# Altium PCB MotorBoard.PcbDoc (part 1 of 2)
Units mm, origin at the board's own origin, x right, y up, seen from the top; angles counter-clockwise.
Board outline 65.2 x 61.84 mm, 2 copper layers (Top Layer, Bottom Layer), stack 1.6 mm thick; 92 components, 59 nets, 370 pads, 87 vias.
Unrouted connection lines stored in the file: 3.
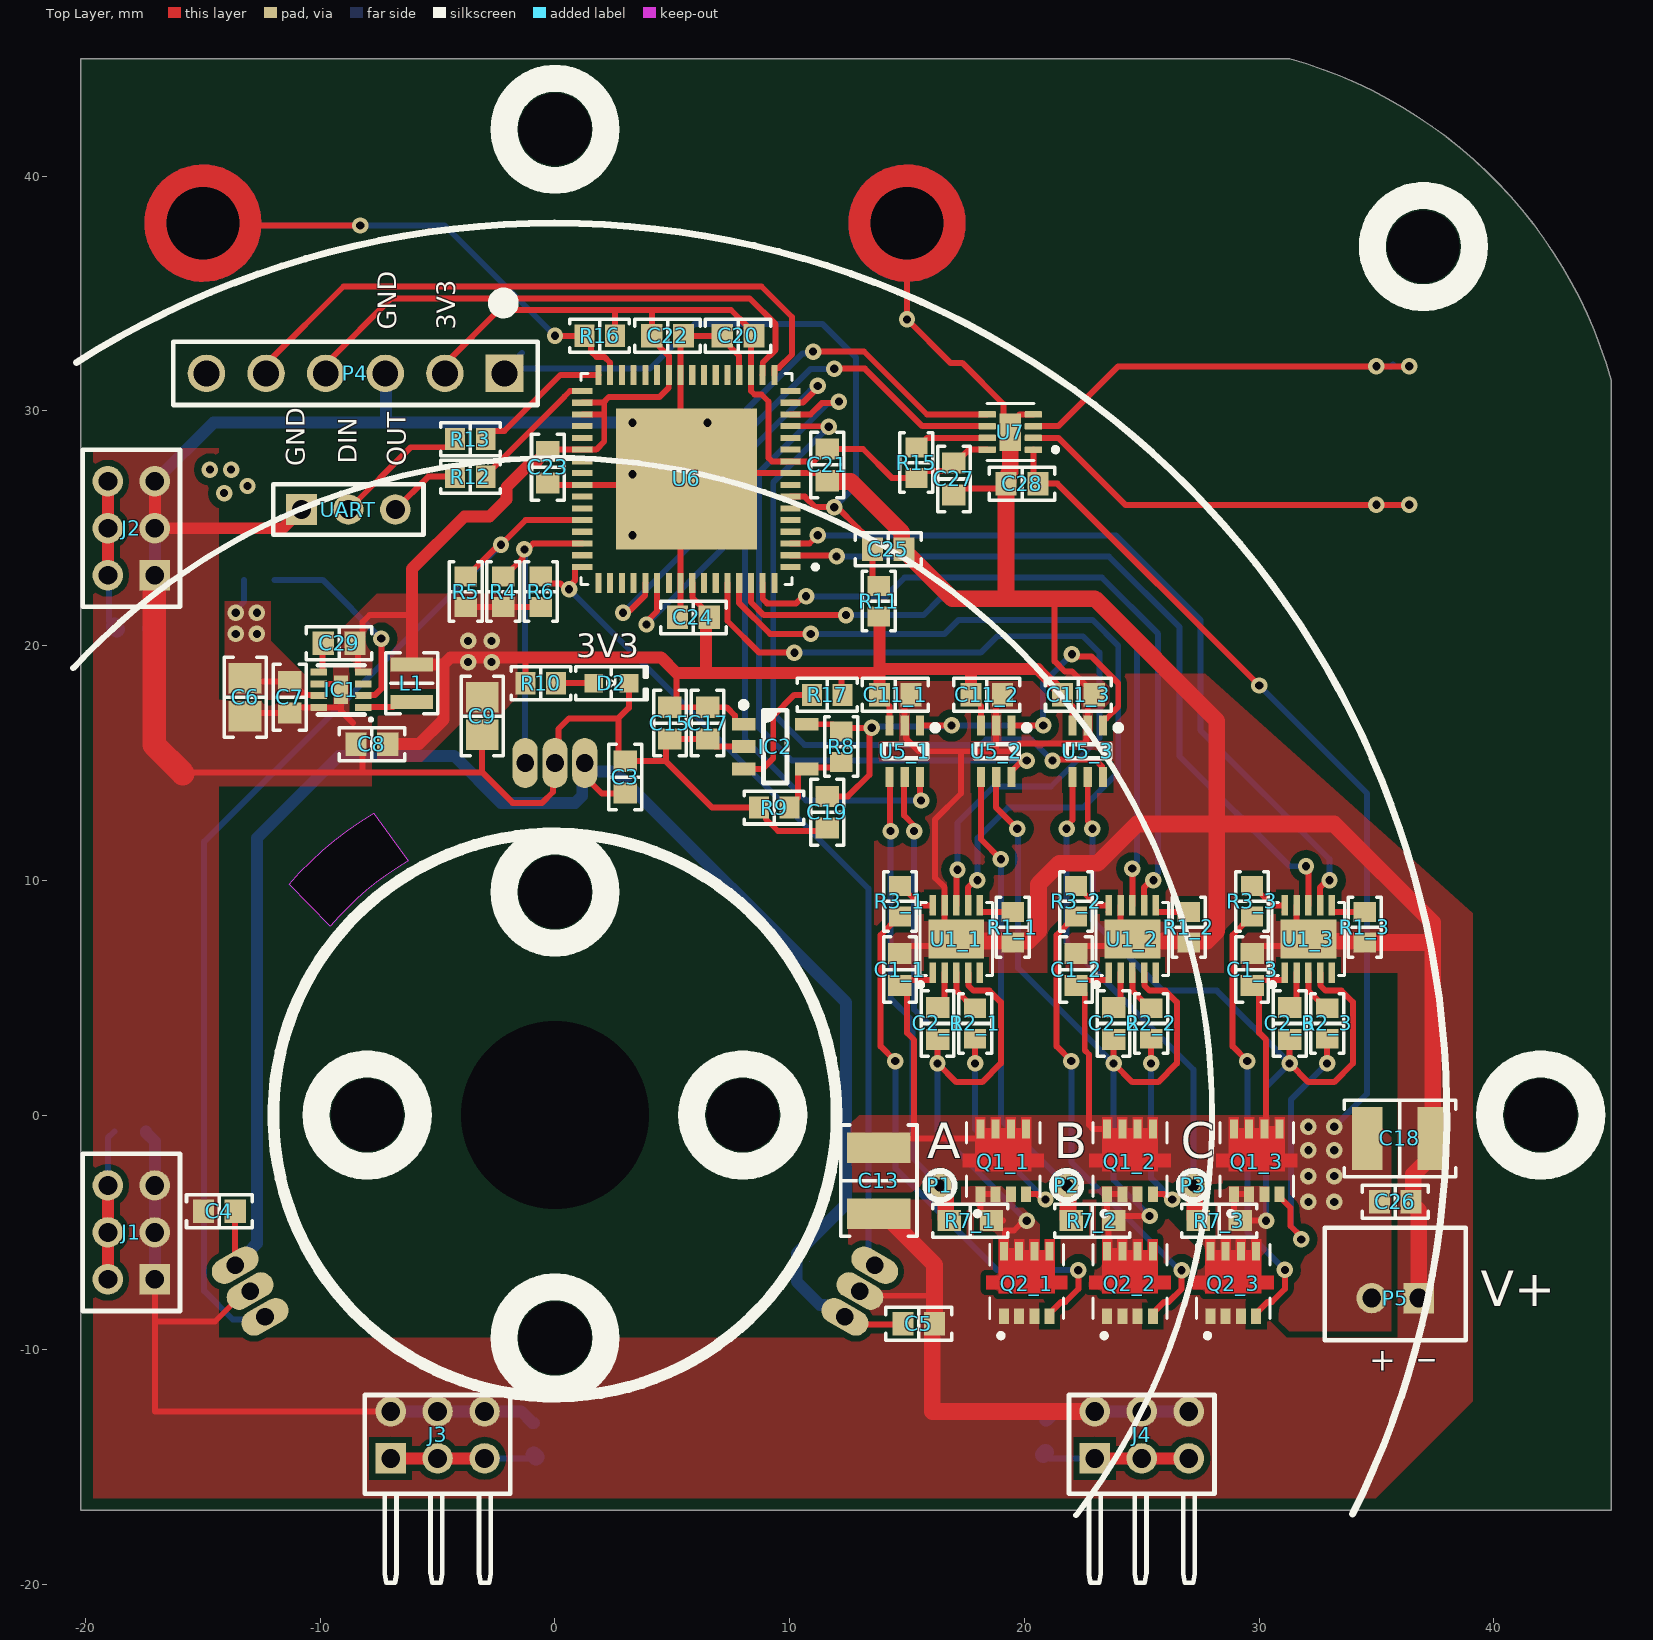
[diagram p0: Top Layer view]
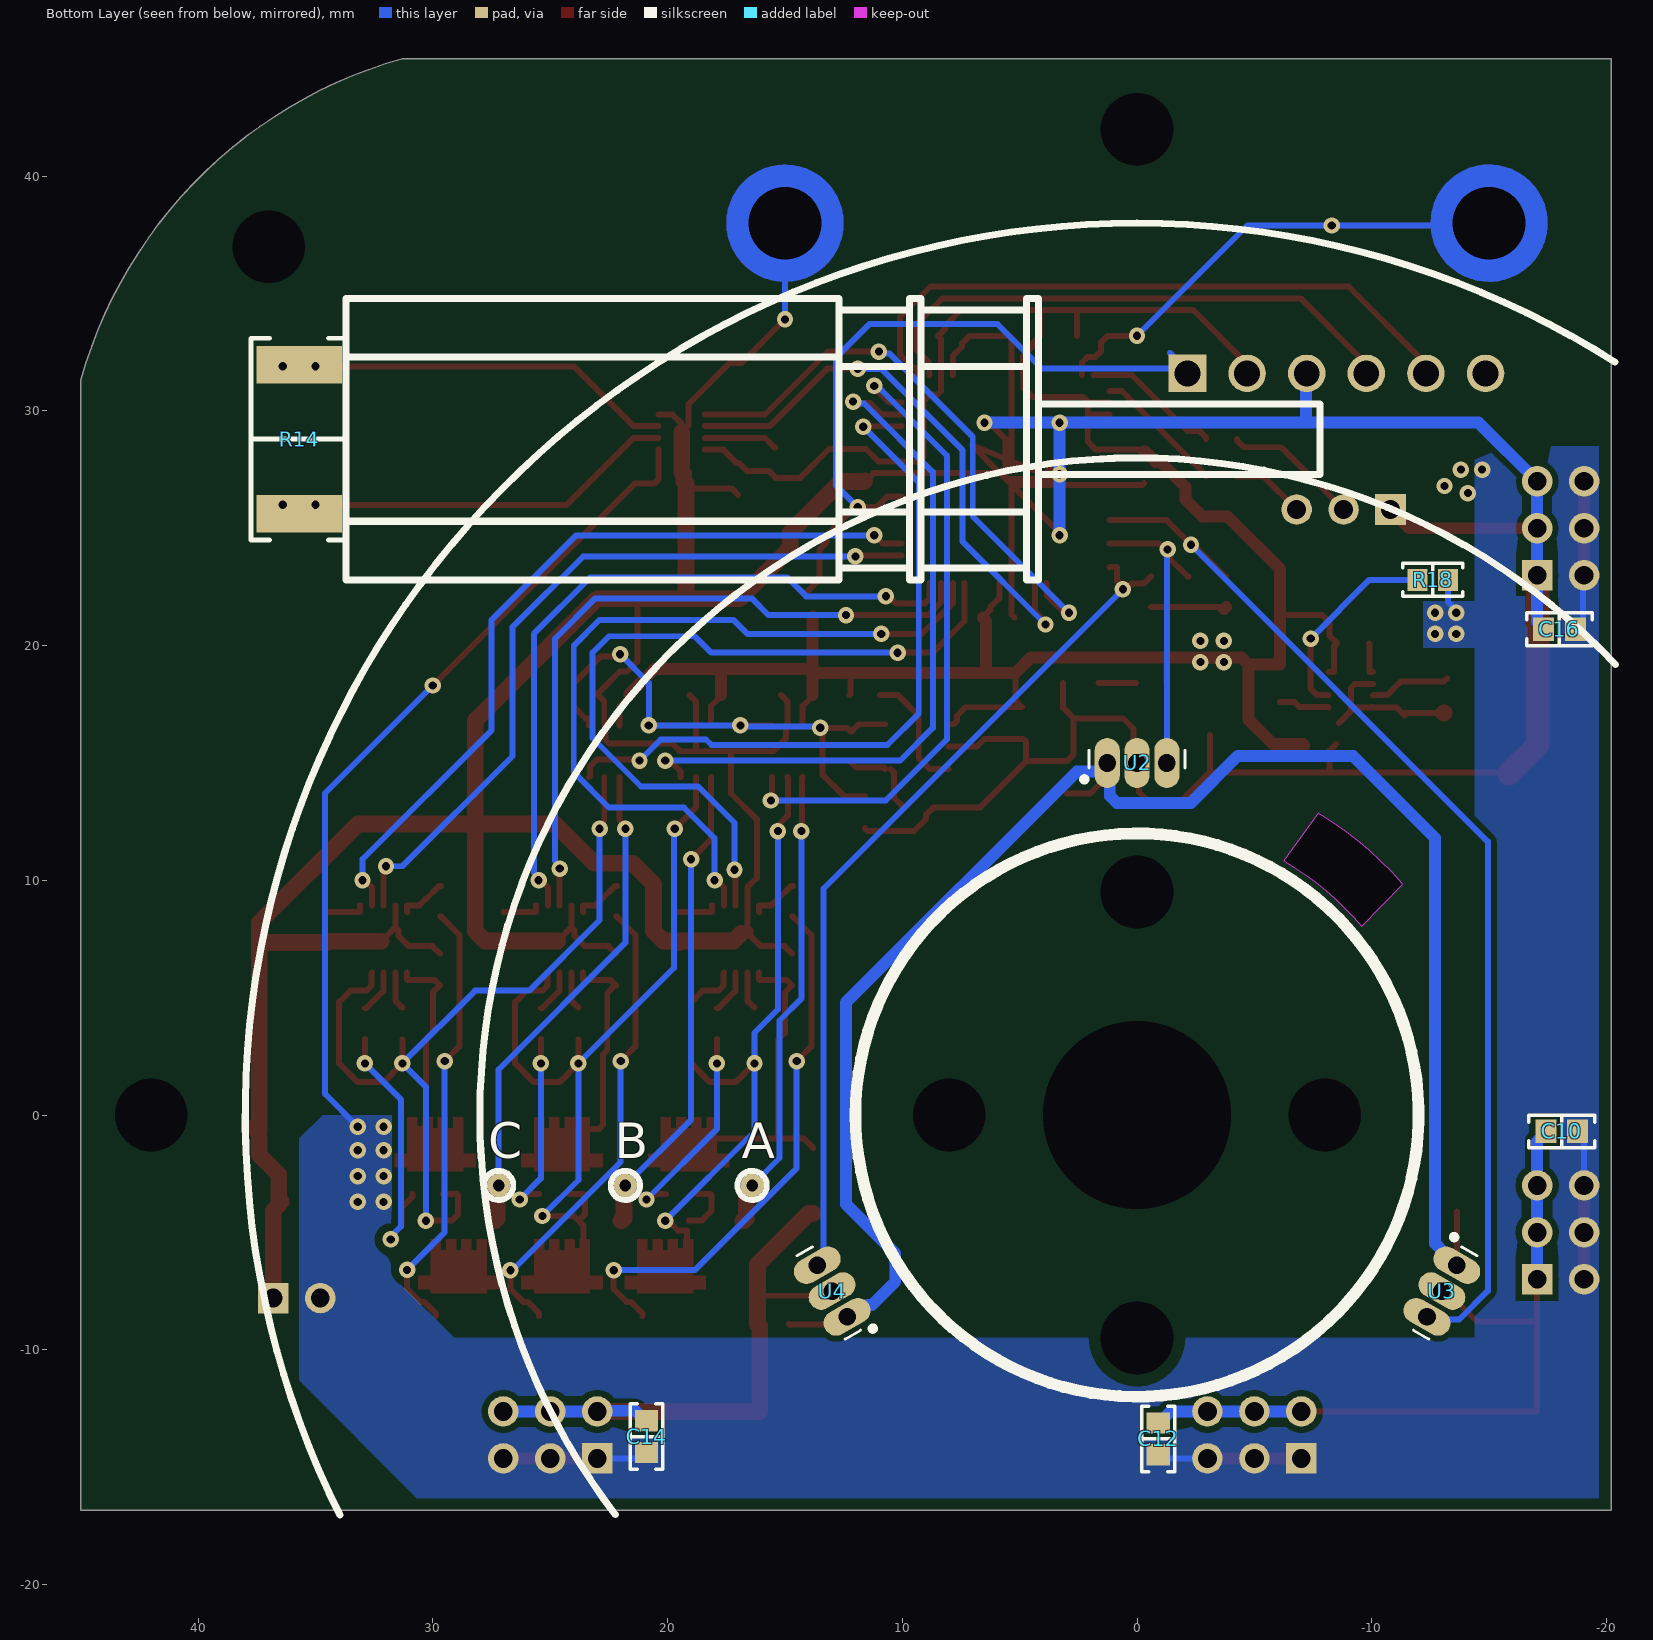
[diagram p1: Bottom Layer view, seen from below]
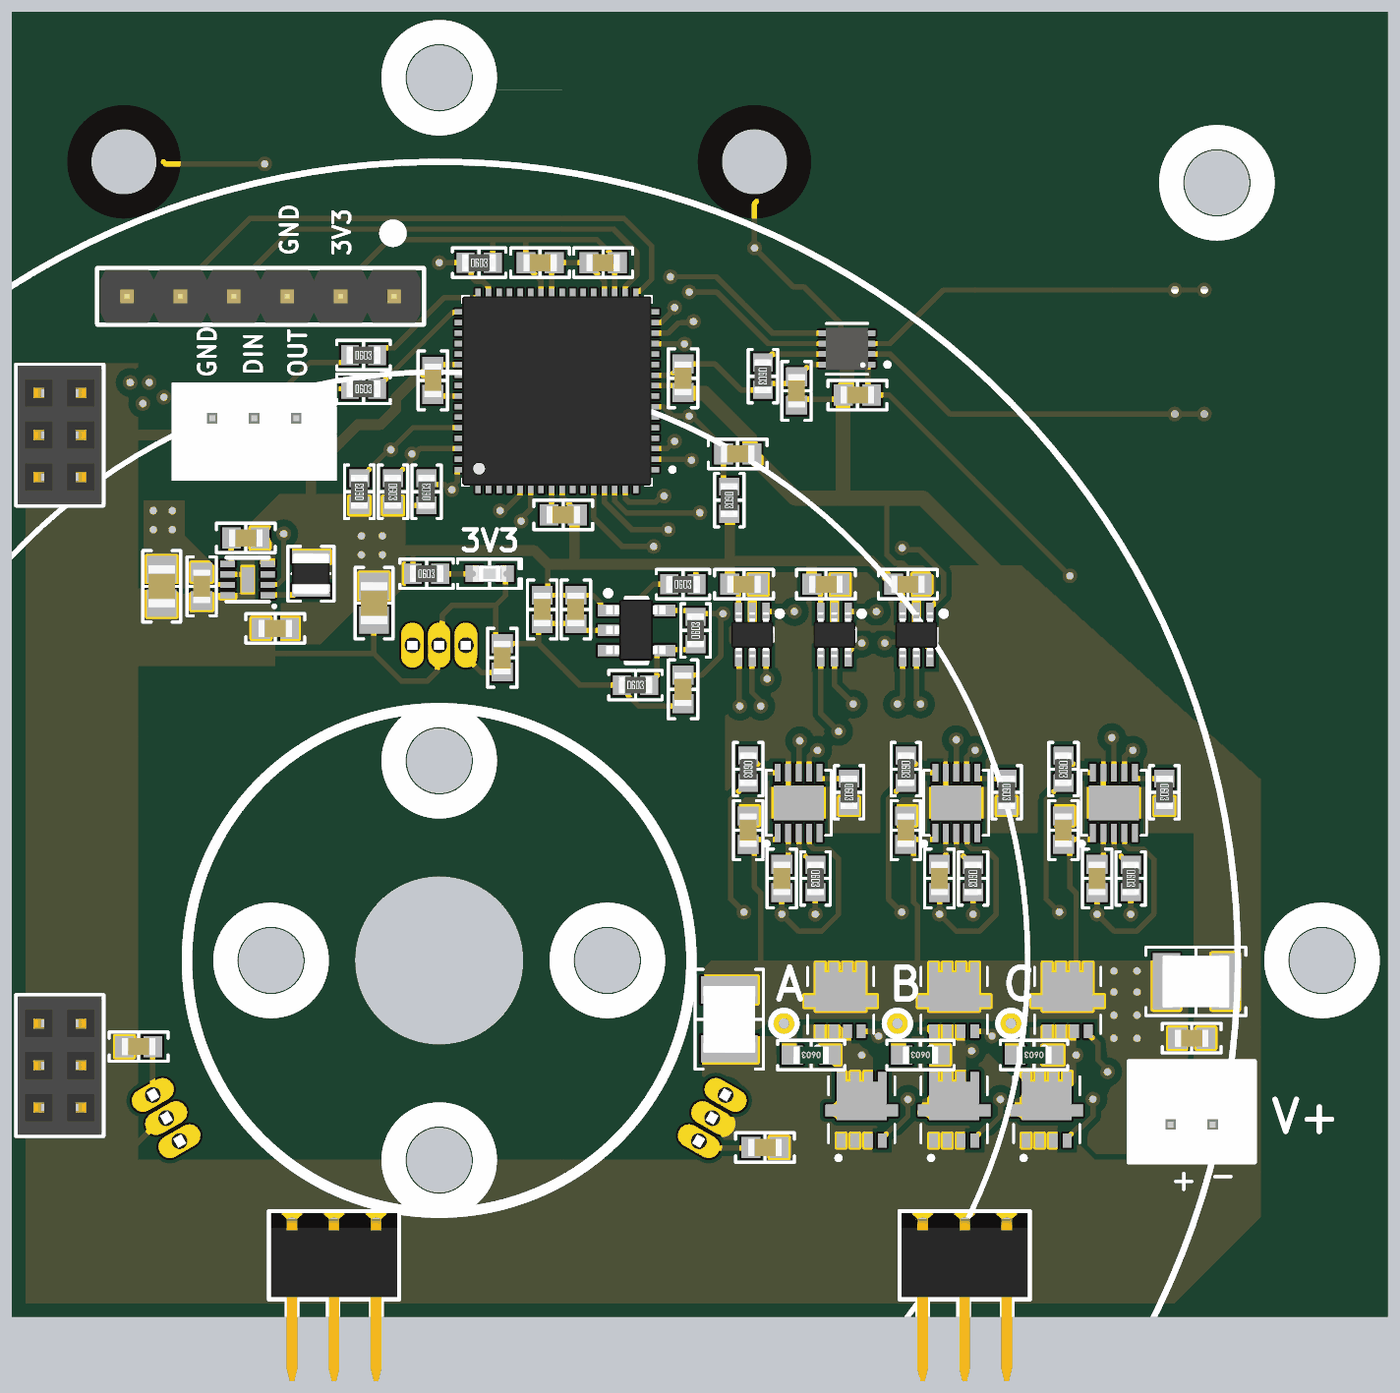
[diagram p2: 3D render of the assembled board from above, using the file's embedded part models]
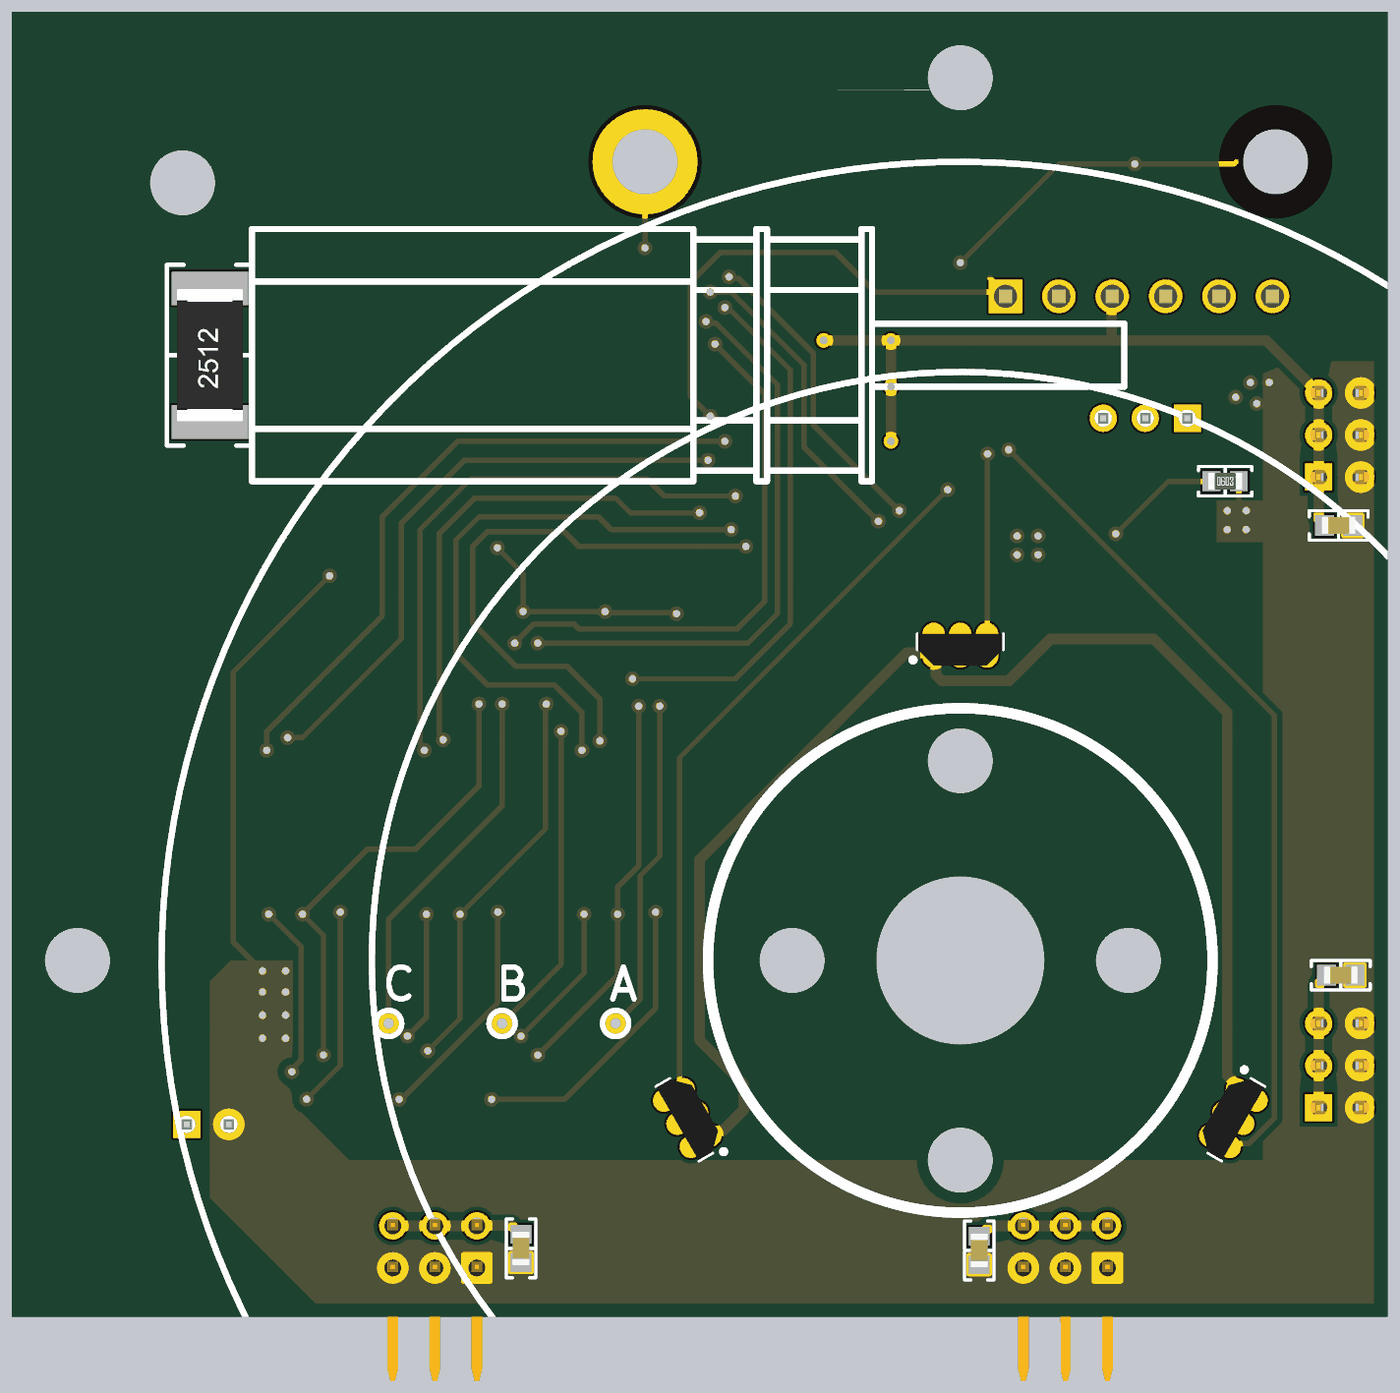
[diagram p3: 3D render of the assembled board from below, using the file's embedded part models]

## Layer stack, top to bottom
Top Solder: solder mask 0.0102, Solder Resist, Dk 3.5
Top Layer: signal copper 0.035
Dielectric 1: dielectric 1.53, FR-4, Dk 4.8
Bottom Layer: signal copper 0.035
Bottom Solder: solder mask 0.0102, Solder Resist, Dk 3.5

## Board outline
-20.2,-16.84 -20.2,45 31.311,45 cw(c26,26) 45,31.311 45,-16.84
cut-out: -9.576,8.035 -11.321,9.841 cw(c0,0) -7.726,12.858 -6.25,10.825 ccw(c0,0)
cut-out: 10.825,-6.25

## Design rules (kind name [scope] priority, off if disabled: settings)
BoardOutlineClearance [All] p1: gap=0.254 ignorepadtopadclearanceinfootprint=FALSE except(0: Arc-SplitContinuation Track-SplitContinuation SMDPad-SplitContinuation THPad-SplitContinuation Via-SplitContinuation Fill-SplitContinuation Poly-SplitContinuation Region-SplitContinuation Text-SplitContinuation; 0.512: Poly-OutlineEdge Poly-CavityEdge Poly-CutoutEdge Poly-SplitBarrior)
Clearance "PolyGon Pour Clearance" [InPolygon] p1: gap=0.254 ignorepadtopadclearanceinfootprint=FALSE except(0.512: Arc-Hole Track-Hole SMDPad-Hole THPad-Hole Via-Hole Fill-Hole Poly-Hole Region-Hole Text-Hole)
Clearance [All] p2: gap=0.152 ignorepadtopadclearanceinfootprint=FALSE except(0.01: Text-Text; 0.127: Arc-Arc Arc-Track Track-Track SMDPad-SMDPad; 0.2: Arc-SMDPad Arc-THPad Arc-Fill Arc-Poly Arc-Region Arc-Hole Track-SMDPad Track-THPad Track-Fill Track-Poly Track-Region Track-Hole; 0.254: Arc-Via Track-Via Via-Via; 0.54: THPad-THPad)
HoleSize [All] p1: absolutevalues=TRUE maxlimit=6.3 minlimit=0.2 maxpercent=80.000 minpercent=20.000
HoleToHoleClearance [All] p1: gap=0.54 allowstackedmicrovias=TRUE
PlaneClearance [All] p1: clearance=0.127
PlaneConnect [All] p1: planeconnectstyle=Direct reliefexpansion=0.508 reliefentries=4 reliefconductorwidth=0.254 reliefairgap=0.254
PolygonConnect [All] p1: connectstyle=Direct reliefconductorwidth=0.254 reliefentries=4 polygonreliefangle="90 Angle" airgapwidth=0.254
RoutingVias [All] p1: holewidth=0.35 width=0.7 viastyle="Through Hole" minholewidth=0.3 minwidth=0.6 maxholewidth=0.5 maxwidth=10
SolderMaskExpansion [All] p1: expansion=0.102 istentingtop=FALSE
Width [All] p1: maxlimit=2 minlimit=0.127 preferedwidth=0.254
26 further rules are at their usual default settings.

## Classes and differential pairs
net class PWML[1..3]: PWML1 PWML2 PWML3
net class PWMH[1..3]: PWMH1 PWMH2 PWMH3
net class HALL_OUT[1..3]: HALL_OUT1 HALL_OUT2 HALL_OUT3
net class I_SENSE[1..3]: I_SENSE1 I_SENSE2 I_SENSE3
net class Bridge_Out[3..1]: Bridge_Out1 Bridge_Out2 Bridge_Out3
channel class Half_bridge_drivers: U_Half_bridge_drivers1 U_Half_bridge_drivers2 U_Half_bridge_drivers3

## Components (designator, comment, footprint, x,y, rotation, side; value= is the part's Value field where it differs from the comment)
C1_1 "1µF" "CAP 0603_1608" 14.7,6.2 r270 top (schematic designator C1)
C1_2 "1µF" "CAP 0603_1608" 22.2,6.2 r270 top (schematic designator C1)
C1_3 "1µF" "CAP 0603_1608" 29.7,6.2 r270 top (schematic designator C1)
C2_1 "0.1µF" "CAP 0603_1608" 16.3,3.9 r90 top (schematic designator C2)
C2_2 "0.1µF" "CAP 0603_1608" 23.8,3.9 r90 top (schematic designator C2)
C2_3 "0.1µF" "CAP 0603_1608" 31.3,3.9 r90 top (schematic designator C2)
C3 "0.1µF" "CAP 0603_1608" 3,14.4 r90 top
C4 "0.1µF" "CAP 0603_1608" -14.3,-4.1 r180 top
C5 "0.1µF" "CAP 0603_1608" 15.5,-8.9 r0 top
C6 "10µF" "CAP 0805_2012" -13.2,17.8 r90 top
C7 "0.1µF" "CAP 0603_1608" -11.3,17.8 r270 top
C8 "1µF" "CAP 0603_1608" -7.8,15.8 r0 top
C9 "22µF" "CAP 0805_2012" -3.1,17 r90 top
C10 "0.1µF" "CAP 0603_1608" -18.1,-0.7 r180 bottom
C11_1 "0.1µF" "CAP 0603_1608" 14.5,17.9 r180 top (schematic designator C11)
C11_2 "0.1µF" "CAP 0603_1608" 18.4,17.9 r180 top (schematic designator C11)
C11_3 "0.1µF" "CAP 0603_1608" 22.3,17.9 r180 top (schematic designator C11)
C12 "0.1µF" "CAP 0603_1608" -0.9,-13.8 r270 bottom
C13 "100µF" "CAP 1210_3225 - 2.8MM" 13.8,-2.8 r90 top
C14 "0.1µF" "CAP 0603_1608" 20.9,-13.7 r90 bottom
C15 "1µF" "CAP 0603_1608" 4.9,16.7 r90 top
C16 "0.1µF" "CAP 0603_1608" -18,20.7 r0 bottom
C17 "0.1µF" "CAP 0603_1608" 6.5,16.7 r270 top
C18 "100µF" "CAP 1210_3225 - 2.8MM" 36,-1 r180 top
C19 "2.2µF" "CAP 0603_1608" 11.6,12.9 r90 top
C20 "0.1µF" "CAP 0603_1608" 7.8,33.2 r180 top
C21 "0.1µF" "CAP 0603_1608" 11.6,27.7 r270 top
C22 "0.1µF" "CAP 0603_1608" 4.8,33.2 r0 top
C23 "0.1µF" "CAP 0603_1608" -0.3,27.6 r270 top
C24 "0.1µF" "CAP 0603_1608" 5.9,21.2 r180 top
C25 "0.1µF" "CAP 0603_1608" 14.2,24.1 r0 top
C26 "0.1µF" "CAP 0603_1608" 35.8,-3.7 r0 top
C27 "0.1µF" "CAP 0603_1608" 17,27.1 r90 top
C28 "0.1µF" "CAP 0603_1608" 19.9,26.9 r180 top
C29 "560pF" "CAP 0603_1608" -9.2,20.1 r0 top
D2 "Green" "LED 0603_1608 GREEN" 2.4,18.4 r0 top
IC1 "MIC23050" "MLF-8 2x2mm" -9.111,18.12 r180 top
IC2 "MIC5377YC5" "TI SOT-23-5 DBV" 9.387,15.7 r0 top
J1 "3x2 Female" 62000621821 -18.05,-5 r90 top
J2 "3x2 Female" 62000621821 -18.05,25 r90 top
J3 "3x2 Male" "2mm 3x2 Male Right - duplicate" -5,-13.63 r0 top
J4 "3x2 Male" "2mm 3x2 Male Right - duplicate" 25,-13.63 r0 top
L1 "2.2uH" "IND 0806_2016" -6.1,18.4 r90 top value=6.8µH
P1 "TP" 2mmHole 16.4,-3 r0 top
P2 "TP" 2mmHole 21.8,-3 r0 top
P3 "TP" 2mmHole 27.2,-3 r0 top
P4 "61300611121" 61300611121 -8.5,31.6 r180 top
P5 "2 pin 2mm JST Male" "2pin - 2mm JST male" 35.8,-7.8 r180 top
Q1_1 "NVTFS5C680NL" NVTFS015N04CTAG 19.1,-1.9 r90 top (schematic designator Q1)
Q1_2 "NVTFS5C680NL" NVTFS015N04CTAG 24.5,-1.9 r90 top (schematic designator Q1)
Q1_3 "NVTFS5C680NL" NVTFS015N04CTAG 29.9,-1.9 r90 top (schematic designator Q1)
Q2_1 "NVTFS5C680NL" NVTFS015N04CTAG 20.1,-7.1 r90 top (schematic designator Q2)
Q2_2 "NVTFS5C680NL" NVTFS015N04CTAG 24.5,-7.1 r90 top (schematic designator Q2)
Q2_3 "NVTFS5C680NL" NVTFS015N04CTAG 28.9,-7.1 r90 top (schematic designator Q2)
R1_1 "10 kOhms" "RES 0603_1608" 19.5,8 r270 top (schematic designator R1)
R1_2 "10 kOhms" "RES 0603_1608" 27,8 r270 top (schematic designator R1)
R1_3 "10 kOhms" "RES 0603_1608" 34.5,8 r270 top (schematic designator R1)
R2_1 "2.55 Ohms" "RES 0603_1608" 17.9,3.9 r270 top (schematic designator R2)
R2_2 "2.55 Ohms" "RES 0603_1608" 25.4,3.9 r270 top (schematic designator R2)
R2_3 "2.55 Ohms" "RES 0603_1608" 32.9,3.9 r270 top (schematic designator R2)
R3_1 "2.55 Ohms" "RES 0603_1608" 14.7,9.1 r270 top (schematic designator R3)
R3_2 "2.55 Ohms" "RES 0603_1608" 22.2,9.1 r270 top (schematic designator R3)
R3_3 "2.55 Ohms" "RES 0603_1608" 29.7,9.1 r270 top (schematic designator R3)
R4 "4.7 kOhms" "RES 0603_1608" -2.2,22.3 r270 top
R5 "4.7 kOhms" "RES 0603_1608" -3.8,22.3 r90 top
R6 "4.7 kOhms" "RES 0603_1608" -0.6,22.3 r90 top
R7_1 "3 mOhms" "STACKPOLE CSR0603" 17.7,-4.5 r180 top (schematic designator R7)
R7_2 "3 mOhms" "STACKPOLE CSR0603" 22.9,-4.5 r180 top (schematic designator R7)
R7_3 "3 mOhms" "STACKPOLE CSR0603" 28.3,-4.5 r180 top (schematic designator R7)
R8 "6.49 kOhms" "RES 0603_1608" 12.2,15.7 r90 top
R9 "10 kOhms" "RES 0603_1608" 9.337,13.1 r0 top
R10 "1 kOhms" "RES 0603_1608" -0.6,18.4 r0 top
R11 "10 kOhms" "RES 0603_1608" 13.8,21.9 r270 top
R12 "21.5 Ohms" "RES 0603_1608" -3.6,27.2 r0 top
R13 "21.5 Ohms" "RES 0603_1608" -3.6,28.8 r0 top
R14 "47 kOhms" "RES 2512_6432" 35.7,28.8 r90 bottom
R15 "1 kOhms" "RES 0603_1608" 15.4,27.8 r270 top
R16 "10 kOhms" "RES 0603_1608" 1.9,33.2 r0 top
R17 "10 kOhms" "RES 0603_1608" 11.6,17.9 r0 top
R18 "10 kOhms" "RES 0603_1608" -12.6,22.8 r180 bottom
U1_1 "DGD0506A" 10-WDFN3030 17.1,7.5 r90 top (schematic designator U1)
U1_2 "DGD0506A" 10-WDFN3030 24.6,7.5 r90 top (schematic designator U1)
U1_3 "DGD0506A" 10-WDFN3030 32.1,7.5 r90 top (schematic designator U1)
U2 "Hall Effect" DRV5011ADLPG 0,15 r180 bottom
U3 "Hall Effect" DRV5011ADLPG -12.99,-7.5 r300 bottom
U4 "Hall Effect" DRV5011ADLPG 12.99,-7.5 r60 bottom
U5_1 "INA210" "TI SC70-6 DCK" 14.9,15.5 r270 top (schematic designator U5)
U5_2 "INA210" "TI SC70-6 DCK" 18.8,15.5 r270 top (schematic designator U5)
U5_3 "INA210" "TI SC70-6 DCK" 22.7,15.5 r270 top (schematic designator U5)
U6 "PIC32MK0512MCF064" QFN50P900X900X100-65N 5.6,27.1 r180 top
U7 "DRV8837CDSGR" SON50P200X200X80-9N 19.4,29.1 r180 top
UART "3 pin 2mm JST Male" "3pin - 2mm header" -8.8,25.8 r0 top

## Footprints (in the part's own frame and the unit in brackets; to place one, negate y for a bottom-side part, rotate by r counter-clockwise, add the part's x,y. Pads: shape width x height; smd on the part's side, far side on the other; paste and mask are expansions set on the pad)
"2mm 3x2 Male Right - duplicate" [mm] "Socket Header, Pitch 2.00 mm, THT, Vertical, dual row, 6p"
  rect 1.3x1.3 hole 0.8: 1(-2,-1)
  round 1.3 hole 0.8: 2(-2,1) 3(0,-1) 4(0,1) 5(2,-1) 6(2,1)
  silkscreen extent -3.1,-6.3 3.1,1.7, body extent -3,-6.4 3,1.6, height 4.33
2mmHole [mm]
  round 1 hole 0.5: 1(0,0)
  silkscreen extent -0.62,-0.62 0.62,0.62
"2pin - 2mm JST male" [mm]
  rect 1.3x1.3 hole 0.8: 1(-1,0)
  round 1.3 hole 0.8: 2(1,0)
  silkscreen extent -3,-3 3,1.8, body extent -2.93,-2.97 2.93,1.7, height 5.89
"3pin - 2mm header" [mm]
  rect 1.3x1.3 hole 0.8: 1(-2,0)
  round 1.3 hole 0.8: 2(0,0) 3(2,0)
  silkscreen extent -3.2,-1.07 3.2,1.07, body extent -3.93,-2.97 3.93,1.7, height 5.89
10-WDFN3030 [mm]
  rect 0.86x0.28 smd: 1(-1.435,1) 2(-1.435,0.5) 3(-1.435,0) 4(-1.435,-0.5) 5(-1.435,-1) 6(1.435,-1) 7(1.435,-0.5) 8(1.435,0) 9(1.435,0.5) 10(1.435,1)
  rect 1.65x2.38 smd: 11(0,0)
  silkscreen extent -2.05,-1.55 1.55,1.63, body extent -1.54,-1.55 1.55,1.56, height 0.8
61300611121 [mm] "Pin Header, pitch 2.54 mm, THT, Vertical, single row, 6p"
  rect 1.6x1.6 hole 1.1: 1(-6.35,0)
  round 1.6 hole 1.1: 2(-3.81,0) 3(-1.27,0) 4(1.27,0) 5(3.81,0) 6(6.35,0)
  silkscreen extent -7.77,-1.35 7.77,1.35, body extent -7.62,-1.27 7.62,1.27, height 8.57
62000621821 [mm] "Socket Header, Pitch 2.00 mm, THT, Vertical, dual row, 6p"
  rect 1.3x1.3 hole 0.8: 1(-2,-1)
  round 1.3 hole 0.8: 2(-2,1) 3(0,-1) 4(0,1) 5(2,-1) 6(2,1)
  silkscreen extent -3.35,-2.07 3.35,2.07, body extent -3.3,-2 3.3,2, height 4.35
"CAP 0603_1608" [mm] "Chip Capacitor, 2-Leads, Body 1.60x0.80mm, IPC Medium Density"
  rect 0.9x1 smd: 1(-0.675,0) 2(0.675,0)
  silkscreen extent -1.4,-0.7 1.4,0.7, body extent -0.8,-0.41 0.8,0.41, height 0.82
"CAP 0805_2012" [mm] "Chip Capacitor, 2-Leads, Body 2.00x1.20mm, IPC Medium Density"
  rect 1.3x1.4 smd: 1(-0.8,0) 2(0.8,0)
  silkscreen extent -1.7,-0.9 1.7,0.9, body extent -1,-0.64 1,0.64, height 1.26
"CAP 1210_3225 - 2.8MM" [mm] "Chip Capacitor, 2-Leads, Body 3.20x2.50mm, IPC Medium Density"
  rect 1.3x2.7 smd: 1(-1.4,0) 2(1.4,0)
  silkscreen extent -2.37,-1.63 2.37,1.63, body extent -1.6,-1.25 1.6,1.25, height 2.8
DRV5011ADLPG [mm]
  oval 1.07x2.14 hole 0.75: 1(-1.27,0) 2(0,0) 3(1.27,0)
  silkscreen extent -2.32,-0.77 2.05,0.54, body extent -2,-0.98 2,0.54, height 11
"IND 0806_2016" [mm] "Chip Capacitor, 2-Leads, Body 2.00x1.20mm, IPC Medium Density"
  rect 0.6x1.8 smd: 1(-0.8,0) 2(0.8,0)
  silkscreen extent -1.3,-1.1 1.3,1.1, body extent -1.01,-0.91 1.01,0.91, height 1.81
"LED 0603_1608 GREEN" [mm] "Chip Diode, 2-Leads, Body 1.60x0.80mm, IPC Medium Density"
  rect 0.8x0.8 smd: 1(-0.75,0) 2(0.75,0)
  silkscreen extent -1.52,-0.7 1.52,0.7, body extent -0.8,-0.4 0.8,0.4, height 0.53
"MLF-8 2x2mm" [mm]
  rect 0.7x0.3 smd: 1(-0.95,0.75) 2(-0.95,0.25) 3(-0.95,-0.25) 4(-0.95,-0.75) 5(0.95,-0.75) 6(0.95,-0.25) 7(0.95,0.25) 8(0.95,0.75)
  rect 0.6x1.2 smd: 9(0,0)
  silkscreen extent -1.28,-1.05 1,1.28, body extent -1,-1 1,1, height 0.85
NVTFS015N04CTAG [mm]
  rect 0.66x0.42 smd: 1(-1.47,0.975) 2(-1.47,0.325) 3(-1.47,-0.325) 4(-1.47,-0.975)
  rect 0.8x0.34 smd: 5(1.3,-0.975) 6(1.3,-0.325) 7(1.3,0.325) 8(1.3,0.975)
  Top Layer region: -0.5,-1.185 -0.5,1.185 -0.32,1.185 -0.32,1.73 0.25,1.73 0.25,1.185 1.8,1.185 1.8,0.765 1.33,0.765 1.33,0.535 1.8,0.535 1.8,0.115 1.33,0.115 1.33,-0.115 1.8,-0.115 1.8,-0.535 1.33,-0.535 1.33,-0.765 1.8,-0.765 1.8,-1.185 0.25,-1.185 0.25,-1.73 -0.32,-1.73 -0.32,-1.185
  silkscreen extent -2.4,-1.58 1.58,1.58, body extent -1.7,-1.7 1.7,1.7, height 1.1
QFN50P900X900X100-65N [mm]
  rect 0.86x0.26 smd: 1(-4.435,3.75) 2(-4.435,3.25) 3(-4.435,2.75) 4(-4.435,2.25) 5(-4.435,1.75) 6(-4.435,1.25) 7(-4.435,0.75) 8(-4.435,0.25) 9(-4.435,-0.25) 10(-4.435,-0.75) 11(-4.435,-1.25) 12(-4.435,-1.75) 13(-4.435,-2.25) 14(-4.435,-2.75) 15(-4.435,-3.25) 16(-4.435,-3.75) 33(4.435,-3.75) 34(4.435,-3.25) 35(4.435,-2.75) 36(4.435,-2.25) 37(4.435,-1.75) 38(4.435,-1.25) 39(4.435,-0.75) 40(4.435,-0.25) 41(4.435,0.25) 42(4.435,0.75) 43(4.435,1.25) 44(4.435,1.75) 45(4.435,2.25) 46(4.435,2.75) 47(4.435,3.25) 48(4.435,3.75)
  rect 0.26x0.86 smd: 17(-3.75,-4.435) 18(-3.25,-4.435) 19(-2.75,-4.435) 20(-2.25,-4.435) 21(-1.75,-4.435) 22(-1.25,-4.435) 23(-0.75,-4.435) 24(-0.25,-4.435) 25(0.25,-4.435) 26(0.75,-4.435) 27(1.25,-4.435) 28(1.75,-4.435) 29(2.25,-4.435) 30(2.75,-4.435) 31(3.25,-4.435) 32(3.75,-4.435) 49(3.75,4.435) 50(3.25,4.435) 51(2.75,4.435) 52(2.25,4.435) 53(1.75,4.435) 54(1.25,4.435) 55(0.75,4.435) 56(0.25,4.435) 57(-0.25,4.435) 58(-0.75,4.435) 59(-1.25,4.435) 60(-1.75,4.435) 61(-2.25,4.435) 62(-2.75,4.435) 63(-3.25,4.435) 64(-3.75,4.435)
  rect 6x6 smd: 65(0,0)
  silkscreen extent -5.6,-4.5 4.5,4.5, body extent -4.52,-4.52 4.52,4.52, height 0.9
"RES 0603_1608" [mm] "Chip Resistor, 2-Leads, Body 1.60x0.80mm, IPC Medium Density"
  rect 0.85x0.95 smd: 1(-0.65,0) 2(0.65,0)
  silkscreen extent -1.27,-0.7 1.27,0.7, body extent -0.8,-0.4 0.8,0.4, height 0.45
"RES 2512_6432" [mm] "Chip Resistor, 2-Leads, Body 6.30x3.15mm, IPC Medium Density"
  rect 1.6x3.65 smd: 1(-3.175,0) 2(3.175,0)
  silkscreen extent -4.3,-2.05 4.3,2.05, body extent -3.15,-1.58 3.15,1.57, height 0.7
SON50P200X200X80-9N [mm]
  rrect25% 0.74x0.28 smd: 1(-0.985,0.75) 2(-0.985,0.25) 3(-0.985,-0.25) 4(-0.985,-0.75) 5(0.985,-0.75) 6(0.985,-0.25) 7(0.985,0.25) 8(0.985,0.75)
  rect 0.9x1.6 smd paste-2: 9(0,0)
  silkscreen extent -2.02,-1.21 1,1.21, body extent -1,-1 1,1, height 0.75
"STACKPOLE CSR0603" [mm] "Chip Resistor, 2-Leads, Body 1.60x0.80mm, IPC Medium Density"
  rect 1x0.9 smd: 1(-0.9,0) 2(0.9,0)
  silkscreen extent -1.6,-0.7 1.6,0.7, body extent -0.85,-0.4 0.85,0.4, height 0.45
"TI SC70-6 DCK" [mm] "SC70, 6-Leads, Body 2.00x2.10mm, Pitch 0.65mm, IPC Medium Density"
  rect 0.85x0.35 smd: 1(-1.1,0.65) 2(-1.1,0) 3(-1.1,-0.65) 4(1.1,-0.65) 5(1.1,0) 6(1.1,0.65)
  silkscreen extent -1.12,-0.9 0.3,1.43, body extent -1.06,-1 1.06,1, height 1.1
"TI SOT-23-5 DBV" [mm] "SOT23, 5-Leads, Body 2.90x2.80mm, Pitch 0.95mm, IPC Medium Density"
  rect 1x0.55 smd: 1(-1.35,0.95) 2(-1.35,0) 3(-1.35,-0.95) 4(1.35,-0.95) 5(1.35,0.95)
  silkscreen extent -1.47,-1.55 0.5,1.9, body extent -1.44,-1.43 1.39,1.48, height 1.5

## Part data
C1_1 C1_2 C1_3 C8 C15: library part GCJ188R71E105KA01D, "CAP CER 1UF 25V X7R 0603", Device Package="0603 (1608 Metric)", Manufacturer="Murata Electronics", Operating Temperature="-55°C ~ 125°C", Ratings=AEC-Q200, Supplier Part Number 1=490-14409-1-ND, Temperature Coefficient=X7R, Tolerance=±10%, Voltage - Rated=25V, Applications="Automotive, Boardflex Sensitive", Capacitance=1µF, ComponentLink1Description=Datasheet, ComponentLink1URL=https://search.murata.co.jp/Ceramy/image/img/A01X/G101/ENG/GCJ188R71E105KA01-01.pdf, ComponentLink2Description="DigiKey Link", ComponentLink2URL=http://digikey.com/product-detail/en/murata-electronics/GCJ188R71E105KA01D/490-14409-1-ND/6606870, Features="Soft Termination", LastUpdated="21-Jan-20 12:01:58 AM", Lifecycle Status=Active, Minimum Order=1, Mounting Type="Surface Mount, MLCC", Package / Case="0603 (1608 Metric)", Packaging=TapeAndReel, Part Number=GCJ188R71E105KA01D, Part Status=Active, PartId=9566, Price=0.05, Series=GCJ, Size / Dimension="0.063\" L x 0.031\" W (1.60mm x 0.80mm)", Supplier 1=DigiKey, Thickness (Max)="0.035\" (0.90mm)"
C2_1 C2_2 C2_3 C3 C4 C5 C7 C10 C11_1 C11_2 C11_3 C12 C14 C16 C17 C20 C21 C22 C23 C24 C25 C26 C27 C28: library part GCG188R92A104KA03D, "CAP CER 0.1UF 100V 0603 EPOXY", Device Package="0603 (1608 Metric)", Manufacturer="Murata Electronics", Operating Temperature="-55°C ~ 150°C", Ratings=AEC-Q200, Supplier Part Number 1=490-18197-1-ND, Temperature Coefficient=X8R, Tolerance=±10%, Voltage - Rated=100V, Applications=Automotive, Capacitance=0.1µF, ComponentLink1Description=Datasheet, ComponentLink1URL=https://search.murata.co.jp/Ceramy/image/img/A01X/G101/ENG/GCG188R92A104KA03-01.pdf, ComponentLink2Description="DigiKey Link", ComponentLink2URL=http://digikey.com/product-detail/en/murata-electronics/GCG188R92A104KA03D/490-18197-1-ND/9867926, Features="Epoxy Mountable", LastUpdated="21-Jan-20 12:01:59 AM", Lifecycle Status=Active, Minimum Order=1, Mounting Type="Surface Mount, MLCC, Epoxy", Package / Case="0603 (1608 Metric)", Packaging=TapeAndReel, Part Number=GCG188R92A104KA03D, Part Status=Active, PartId=9025, Price=0.07, Series=GCG, Size / Dimension="0.063\" L x 0.031\" W (1.60mm x 0.80mm)", Supplier 1=DigiKey, Thickness (Max)="0.035\" (0.90mm)"
C6: library part C2012X7S1E106K125AC, "CAP CER 10UF 25V X7S 0805", Device Package="0805 (2012 Metric)", Manufacturer="TDK Corporation", Operating Temperature="-55°C ~ 125°C", Supplier Part Number 1=445-181600-1-ND, Temperature Coefficient=X7S, Tolerance=±10%, Voltage - Rated=25V, Applications="General Purpose", Capacitance=10µF, ComponentLink1Description=Datasheet, ComponentLink1URL=https://product.tdk.com/en/search/capacitor/ceramic/mlcc/info?part_no=C2012X7S1E106K125AC?ref_disty=digikey, ComponentLink2Description="DigiKey Link", ComponentLink2URL=http://digikey.com/product-detail/en/tdk-corporation/C2012X7S1E106K125AC/445-181600-1-ND/9991478, Features="Low ESL", LastUpdated="21-Jan-20 12:03:04 AM", Lifecycle Status=Active, Minimum Order=1, Mounting Type="Surface Mount, MLCC", Package / Case="0805 (2012 Metric)", Packaging=TapeAndReel, Part Number=C2012X7S1E106K125AC, Part Status=Active, PartId=3339, Price=0.15, Series=C, Size / Dimension="0.079\" L x 0.049\" W (2.00mm x 1.25mm)", Supplier 1=DigiKey, Thickness (Max)="0.057\" (1.45mm)"
C9: library part CL21A226MOQNNNE, "CAP CER 22UF 16V X5R 0805", Device Package="0805 (2012 Metric)", Manufacturer="Samsung Electro-Mechanics", Operating Temperature="-55°C ~ 85°C", Supplier Part Number 1=1276-2909-1-ND, Temperature Coefficient=X5R, Tolerance=±20%, Voltage - Rated=16V, Applications="General Purpose", Capacitance=22µF, ComponentLink1Description=Datasheet, ComponentLink1URL=http://www.samsungsem.com/kr/support/product-search/mlcc/CL21A226MOQNNNE.jsp, ComponentLink2Description="DigiKey Link", ComponentLink2URL=http://digikey.com/product-detail/en/samsung-electro-mechanics/CL21A226MOQNNNE/1276-2909-1-ND/3890995, LastUpdated="21-Jan-20 12:03:05 AM", Lifecycle Status=Active, Minimum Order=1, Mounting Type="Surface Mount, MLCC", Package / Case="0805 (2012 Metric)", Packaging=TapeAndReel, Part Number=CL21A226MOQNNNE, Part Status=Active, PartId=3052, Price=0.11, Series=CL, Size / Dimension="0.079\" L x 0.049\" W (2.00mm x 1.25mm)", Supplier 1=DigiKey, Thickness (Max)="0.055\" (1.40mm)"
C13 C18: library part EMK325ABJ107MM-P, "CAP CER 100UF 16V X5R 1210", Device Package="1210 (3225 Metric)", Manufacturer="Taiyo Yuden", Operating Temperature="-55°C ~ 85°C", Supplier Part Number 1=587-5426-1-ND, Temperature Coefficient=X5R, Tolerance=±20%, Voltage - Rated=16V, Applications="General Purpose", Capacitance=100µF, ComponentLink1Description=Datasheet, ComponentLink1URL="https://ds.yuden.co.jp/TYCOMPAS/ut/detail?pn=EMK325ABJ107MM-P &u=M", ComponentLink2Description="DigiKey Link", ComponentLink2URL=http://digikey.com/product-detail/en/taiyo-yuden/EMK325ABJ107MM-P/587-5426-1-ND/7067102, LastUpdated="21-Jan-20 12:30:21 AM", Lifecycle Status=Active, Minimum Order=1, Mounting Type="Surface Mount, MLCC", Package / Case="1210 (3225 Metric)", Packaging=TapeAndReel, Part Number=EMK325ABJ107MM-P, Part Status=Active, PartId=24141, Price=0.71, Series=M, Size / Dimension="0.126\" L x 0.098\" W (3.20mm x 2.50mm)", Supplier 1=DigiKey, Thickness (Max)="0.110\" (2.80mm)"
C19: library part CC0603ZRY5V5BB225, "CAP CER 2.2UF 6.3V Y5V 0603", Device Package="0603 (1608 Metric)", Manufacturer=Yageo, Operating Temperature="-30°C ~ 85°C", Supplier Part Number 1=311-1452-1-ND, Temperature Coefficient="Y5V (F)", Tolerance="-20%, +80%", Voltage - Rated=6.3V, Applications="General Purpose", Capacitance=2.2µF, ComponentLink1Description=Datasheet, ComponentLink1URL=http://www.yageo.com/documents/recent/UPY-GPHC_Y5V_6.3V-to-50V_8.pdf, ComponentLink2Description="DigiKey Link", ComponentLink2URL=http://digikey.com/product-detail/en/yageo/CC0603ZRY5V5BB225/311-1452-1-ND/2833758, LastUpdated="21-Jan-20 12:02:09 AM", Lifecycle Status=Active, Minimum Order=1, Mounting Type="Surface Mount, MLCC", Package / Case="0603 (1608 Metric)", Packaging=TapeAndReel, Part Number=CC0603ZRY5V5BB225, Part Status=Active, PartId=2250, Price=0.02, Series=CC, Size / Dimension="0.063\" L x 0.031\" W (1.60mm x 0.80mm)", Supplier 1=DigiKey, Thickness (Max)="0.035\" (0.90mm)"
C29: library part GCJ188R71E105KA01D, "CAP CER 1UF 25V X7R 0603", Capacitance=1µF, Device Package="0603 (1608 Metric)", Manufacturer="Murata Electronics", Operating Temperature="-55°C ~ 125°C", Ratings=AEC-Q200, Supplier Part Number 1=490-14409-1-ND, Temperature Coefficient=X7R, Tolerance=±10%, Voltage - Rated=25V, Applications="Automotive, Boardflex Sensitive", ComponentLink1Description=Datasheet, ComponentLink1URL=https://search.murata.co.jp/Ceramy/image/img/A01X/G101/ENG/GCJ188R71E105KA01-01.pdf, ComponentLink2Description="DigiKey Link", ComponentLink2URL=http://digikey.com/product-detail/en/murata-electronics/GCJ188R71E105KA01D/490-14409-1-ND/6606870, Features="Soft Termination", LastUpdated="21-Jan-20 12:01:58 AM", Lifecycle Status=Active, Minimum Order=1, Mounting Type="Surface Mount, MLCC", Package / Case="0603 (1608 Metric)", Packaging=TapeAndReel, Part Number=GCJ188R71E105KA01D, Part Status=Active, PartId=9566, Price=0.05, Series=GCJ, Size / Dimension="0.063\" L x 0.031\" W (1.60mm x 0.80mm)", Supplier 1=DigiKey, Thickness (Max)="0.035\" (0.90mm)"
D2: library part XZCDGK53W-8VF, "1.6X0.8MM LC GREEN PIXSOLED DOME", Current - Test=2mA, Device Package="0603 (1608 Metric)", Lens Color=Colorless, Manufacturer=SunLED, Millicandela Rating=417mcd, Supplier Device Package=2-SMD, Supplier Part Number 1=1497-XZCDGK53W-8VFCT-ND, Voltage - Forward (Vf) (Typ)=2.65V, Color=Green, ComponentLink1Description=Datasheet, ComponentLink1URL=https://www.sunledusa.com/products/spec/XZCDGK53W-8VF.pdf, ComponentLink2Description="DigiKey Link", ComponentLink2URL=http://digikey.com/product-detail/en/sunled/XZCDGK53W-8VF/1497-XZCDGK53W-8VFCT-ND/10449792, Configuration=Independent, Height (Max)=1.10mm, LastUpdated="21-Jan-20 3:12:09 AM", Lens Size="0.35mm Dia", Lens Style="Round with Domed Top", Lens Transparency=Clear, Lifecycle Status=Active, Minimum Order=1, Mounting Type="Surface Mount", Package / Case="0603 (1608 Metric)", Packaging=Unknown, Part Number=XZCDGK53W-8VF, Part Status=Active, PartId=938, Price=0.18, Series="Ultra Low Current", Size / Dimension="1.60mm L x 0.80mm W", Supplier 1=DigiKey, Viewing Angle=60°, Wavelength - Dominant=525nm, Wavelength - Peak=515nm
IC2: "IC REG LIN POS ADJ 150MA SOT23-5", Current - Output=150mA, Current - Quiescent (Iq)=100µA, Current - Supply (Max)=140µA, Device Package="SC-74A, SOT-753", Manufacturer="Texas Instruments", Operating Temperature="-40°C ~ 125°C", Supplier Device Package=SOT-23-5, Supplier Part Number 1=296-11014-1-ND, Voltage - Input (Max)=10V, Voltage - Output (Max)=6.5V, Voltage - Output (Min/Fixed)=1.5V, ComponentLink1Description=Datasheet, ComponentLink1URL=http://www.ti.com/general/docs/suppproductinfo.tsp?distId=10&gotoUrl=http%3A%2F%2Fwww.ti.com%2Flit%2Fgpn%2Ftps763, ComponentLink2Description="DigiKey Link", ComponentLink2URL=http://digikey.com/product-detail/en/texas-instruments/TPS76301DBVR/296-11014-1-ND/477331, Control Features=Enable, LastUpdated="18-Jan-20 8:02:45 PM", Lifecycle Status=Active, Minimum Order=1, Mounting Type="Surface Mount", Number of Regulators=1, Output Configuration=Positive, Output Type=Adjustable, Package / Case="SC-74A, SOT-753", Packaging=TapeAndReel, Part Number=MIC5377YC5, Part Status=Active, Price=0.33, Protection Features="Over Current, Over Temperature, Reverse Polarity", PSRR="60dB (1kHz)", Series=-, Supplier 1=DigiKey
J1 J2: library part 62000621821, "WR-PHD Socket Header, THT, pitch 2mm, Dual Row, Vertical, 6p", Contact Resistance=20mOhm, Manufacturer="Wurth Elektronik", Operating Temperature="-40 to +105degC", Rated Current=2A, Withstanding Voltage=500VAC, Working Voltage=250VAC, ComponentLink1Description=Manufacturer, ComponentLink1URL=http://www.we-online.de, ComponentLink2Description=Datasheet, ComponentLink2URL=https://www.we-online.com/catalog/datasheet/62000621821.pdf, Gender="Socket Header", Manufacturer Part Number=62000621821, Mounting Technology=THT, Orientation=Vertical, Packaging=Tube, Pin Number=6, Pitch=2mm, Published Date="May 2020", Row Number=Dual
J3 J4: library part "2mm Male 3x2 Right", "2mm Male 3x2 Right", Contact Resistance=20mOhm, Manufacturer="Wurth Elektronik", Manufacturer Part Number=62000621821, Operating Temperature="-40 to +105degC", Rated Current=2A, Withstanding Voltage=500VAC, Working Voltage=250VAC, ComponentLink1Description=Manufacturer, ComponentLink1URL=http://www.we-online.de, ComponentLink2Description=Datasheet, ComponentLink2URL=https://www.we-online.com/catalog/datasheet/62000621821.pdf, Gender="Socket Header", Mounting Technology=THT, Orientation=Vertical, Packaging=Tube, Pin Number=6, Pitch=2mm, Published Date="May 2020", Row Number=Dual
L1: library part LQH2MPN6R8MGRL, "FIXED IND 6.8UH 530MA 864 MOHM", Current - Saturation=730mA, Current Rating (Amps)=530mA, DC Resistance (DCR)="864mOhm Max", Device Package="0806 (2016 Metric)", Frequency - Self Resonant=35MHz, Inductance=6.8µH, Inductance Frequency - Test=1MHz, Manufacturer="Murata Electronics", Operating Temperature="-40°C ~ 105°C", Supplier Part Number 1=490-15920-1-ND, Tolerance=±20%, ComponentLink1Description=Datasheet, ComponentLink1URL=https://search.murata.co.jp/Ceramy/image/img/P02/JELF243A-0142.pdf, ComponentLink2Description="DigiKey Link", ComponentLink2URL=http://digikey.com/product-detail/en/murata-electronics/LQH2MPN6R8MGRL/490-15920-1-ND/6800585, Height - Seated (Max)="0.037\" (0.95mm)", LastUpdated="21-Jan-20 3:55:54 AM", Lifecycle Status=Active, Material - Core=Ferrite, Minimum Order=1, Mounting Type="Surface Mount", Package / Case="0806 (2016 Metric)", Packaging=TapeAndReel, Part Number=LQH2MPN6R8MGRL, Part Status=Active, PartId=3181, Price=0.10, Series=LQH2, Shielding=Shielded, Size / Dimension="0.079\" L x 0.063\" W (2.00mm x 1.60mm)", Supplier 1=DigiKey, Supplier Device Package="0806 (2016 Metric)", Type=Wirewound
P4: "WR-PHD Pin Header, THT, pitch 2.54mm, Single Row, Vertical, 6p", Contact Resistance=20mOhm, Manufacturer="Wurth Elektronik", Operating Temperature="-40 to +105degC", Rated Current=3A, Withstanding Voltage=500VAC, Working Voltage=250VAC, ComponentLink1Description=Manufacturer, ComponentLink1URL=http://www.we-online.de, ComponentLink2Description=Datasheet, ComponentLink2URL=https://www.we-online.com/catalog/datasheet/61300611121.pdf, Gender="Pin Header", Manufacturer Part Number=61300611121, Mounting Technology=THT, Orientation=Vertical, Packaging=Bag, Pin Number=6, Pitch=2.54mm, Published Date="May 2020", Row Number=Single
R1_1 R1_2 R1_3 R9 R11 R16 R17 R18: library part RNCS0603BKE10K0, "RES 10K OHM 0.1% 1/16W 0603", Device Package="0603 (1608 Metric)", Manufacturer="Stackpole Electronics Inc", Operating Temperature="-55°C ~ 155°C", Power (Watts)="0.063W, 1/16W", Ratings=AEC-Q200, Supplier Device Package=0603, Supplier Part Number 1=RNCS0603BKE10K0CT-ND, Temperature Coefficient=±25ppm/°C, Tolerance=±0.1%, ComponentLink1Description=Datasheet, ComponentLink1URL=https://www.seielect.com/catalog/sei-rncs_rnch.pdf, ComponentLink2Description="DigiKey Link", ComponentLink2URL=http://digikey.com/product-detail/en/stackpole-electronics-inc/RNCS0603BKE10K0/RNCS0603BKE10K0CT-ND/1800113, Composition="Thin Film", Features="Anti-Corrosive, Automotive AEC-Q200, Moisture Resistant", Height - Seated (Max)="0.022\" (0.55mm)", LastUpdated="21-Jan-20 12:25:01 AM", Lifecycle Status=Active, Minimum Order=1, Number of Terminations=2, Package / Case="0603 (1608 Metric)", Packaging=TapeAndReel, Part Number=RNCS0603BKE10K0, Part Status=Active, PartId=4838, Price=0.08, Resistance="10 kOhms", Series=RNCS, Size / Dimension="0.061\" L x 0.031\" W (1.55mm x 0.80mm)", Supplier 1=DigiKey
R2_1 R2_2 R2_3 R3_1 R3_2 R3_3: library part CRCW06032R55FKEA, "RES SMD 2.55 OHM 1% 1/10W 0603", Device Package="0603 (1608 Metric)", Manufacturer="Vishay Dale", Operating Temperature="-55°C ~ 155°C", Power (Watts)="0.1W, 1/10W", Ratings=AEC-Q200, Supplier Device Package=0603, Supplier Part Number 1=541-2.55HHCT-ND, Temperature Coefficient=±100ppm/°C, Tolerance=±1%, ComponentLink1Description=Datasheet, ComponentLink1URL=http://www.vishay.com/docs/20035/dcrcwe3.pdf, ComponentLink2Description="DigiKey Link", ComponentLink2URL=http://digikey.com/product-detail/en/vishay-dale/CRCW06032R55FKEA/541-2.55HHCT-ND/1962041, Composition="Thick Film", Features="Automotive AEC-Q200", Height - Seated (Max)="0.020\" (0.50mm)", LastUpdated="21-Jan-20 12:16:55 AM", Lifecycle Status=Active, Minimum Order=1, Number of Terminations=2, Package / Case="0603 (1608 Metric)", Packaging=CutTape, Part Number=CRCW06032R55FKEA, Part Status=Active, PartId=23466, Price=0.10, Resistance="2.55 Ohms", Series=CRCW, Size / Dimension="0.061\" L x 0.033\" W (1.55mm x 0.85mm)", Supplier 1=DigiKey
R4 R5 R6: library part CRCW06034K70FKTA, "RES SMD 4.7K OHM 1% 1/10W 0603", Device Package="0603 (1608 Metric)", Manufacturer="Vishay Dale", Operating Temperature="-55°C ~ 155°C", Power (Watts)="0.1W, 1/10W", Ratings=AEC-Q200, Supplier Device Package=0603, Supplier Part Number 1=541-3004-1-ND, Temperature Coefficient=±100ppm/°C, Tolerance=±1%, ComponentLink1Description=Datasheet, ComponentLink1URL=http://www.vishay.com/docs/20008/dcrcw.pdf, ComponentLink2Description="DigiKey Link", ComponentLink2URL=http://digikey.com/product-detail/en/vishay-dale/CRCW06034K70FKTA/541-3004-1-ND/6073647, Composition="Thick Film", Features="Automotive AEC-Q200", Height - Seated (Max)="0.020\" (0.50mm)", LastUpdated="21-Jan-20 12:16:37 AM", Lifecycle Status=Active, Minimum Order=1, Number of Terminations=2, Package / Case="0603 (1608 Metric)", Packaging=TapeAndReel, Part Number=CRCW06034K70FKTA, Part Status=Active, PartId=23863, Price=0.01, Resistance="4.7 kOhms", Series=CRCW, Size / Dimension="0.063\" L x 0.033\" W (1.60mm x 0.85mm)", Supplier 1=DigiKey
R7_1 R7_2 R7_3: library part CSS0603FT3L00, "RES SHUNT, 0603, 0.003 OHM, 1%,", Device Package="0603 (1608 Metric)", Manufacturer="Stackpole Electronics Inc", Operating Temperature="-55°C ~ 155°C", Power (Watts)="0.333W, 1/3W", Ratings=AEC-Q200, Supplier Device Package=0603, Supplier Part Number 1=738-CSS0603FT3L00CT-ND, Temperature Coefficient=±100ppm/°C, Tolerance=±1%, ComponentLink2Description="DigiKey Link", ComponentLink2URL=http://digikey.com/product-detail/en/stackpole-electronics-inc/CSS0603FT3L00/738-CSS0603FT3L00CT-ND/10719388, Composition="Metal Element", Features="Automotive AEC-Q200, Current Sense", Height - Seated (Max)="0.026\" (0.65mm)", LastUpdated="19-Jul-20 11:45:32 PM", Lifecycle Status=Active, Minimum Order=1, Number of Terminations=2, Packaging=TapeAndReel, Part Number=CSS0603FT3L00, Part Status=Active, PartId=1932, Price=0.10, Resistance="3 mOhms", Series=CSS, Size / Dimension="0.063\" L x 0.031\" W (1.60mm x 0.80mm)", Supplier 1=DigiKey
R8: library part RC0603FR-076K49L, "RES SMD 6.49K OHM 1% 1/10W 0603", Device Package="0603 (1608 Metric)", Manufacturer=Yageo, Operating Temperature="-55°C ~ 155°C", Power (Watts)="0.1W, 1/10W", Supplier Device Package=0603, Supplier Part Number 1=311-6.49KHRCT-ND, Temperature Coefficient=±100ppm/°C, Tolerance=±1%, ComponentLink1Description=Datasheet, ComponentLink1URL=https://www.yageo.com/upload/media/product/productsearch/datasheet/rchip/PYu-RC_Group_51_RoHS_L_10.pdf, ComponentLink2Description="DigiKey Link", ComponentLink2URL=http://digikey.com/product-detail/en/yageo/RC0603FR-076K49L/311-6.49KHRCT-ND/730268, Composition="Thick Film", Features="Moisture Resistant", Height - Seated (Max)="0.022\" (0.55mm)", LastUpdated="21-Jan-20 12:22:01 AM", Lifecycle Status=Active, Minimum Order=1, Number of Terminations=2, Package / Case="0603 (1608 Metric)", Packaging=CutTape, Part Number=RC0603FR-076K49L, Part Status=Active, PartId=12285, Price=0.10, Resistance="6.49 kOhms", Series=RC, Size / Dimension="0.063\" L x 0.031\" W (1.60mm x 0.80mm)", Supplier 1=DigiKey
R10: library part RNCF0603DTE1K00, "RES 1K OHM 0.5% 1/10W 0603", Device Package="0603 (1608 Metric)", Manufacturer="Stackpole Electronics Inc", Operating Temperature="-55°C ~ 155°C", Power (Watts)="0.1W, 1/10W", Ratings=AEC-Q200, Supplier Device Package=0603, Supplier Part Number 1=RNCF0603DTE1K00CT-ND, Temperature Coefficient=±25ppm/°C, Tolerance=±0.5%, ComponentLink1Description=Datasheet, ComponentLink1URL=https://www.seielect.com/catalog/sei-rncf.pdf, ComponentLink2Description="DigiKey Link", ComponentLink2URL=http://digikey.com/product-detail/en/stackpole-electronics-inc/RNCF0603DTE1K00/RNCF0603DTE1K00CT-ND/9915086, Composition="Thin Film", Features="Automotive AEC-Q200", Height - Seated (Max)="0.022\" (0.55mm)", LastUpdated="21-Jan-20 12:14:28 AM", Lifecycle Status=Active, Minimum Order=1, Number of Terminations=2, Package / Case="0603 (1608 Metric)", Packaging=TapeAndReel, Part Number=RNCF0603DTE1K00, Part Status=Active, PartId=26300, Price=0.05, Resistance="1 kOhms", Series=RNCF, Size / Dimension="0.061\" L x 0.031\" W (1.55mm x 0.80mm)", Supplier 1=DigiKey
R12 R13: library part ERJ-3EKF21R5V, "RES SMD 21.5 OHM 1% 1/10W 0603", Device Package="0603 (1608 Metric)", Manufacturer="Panasonic Electronic Components", Operating Temperature="-55°C ~ 155°C", Power (Watts)="0.1W, 1/10W", Ratings=AEC-Q200, Supplier Device Package=0603, Supplier Part Number 1=P21.5HCT-ND, Temperature Coefficient=±100ppm/°C, Tolerance=±1%, ComponentLink1Description=Datasheet, ComponentLink1URL=https://industrial.panasonic.com/cdbs/www-data/pdf/RDA0000/AOA0000C304.pdf, ComponentLink2Description="DigiKey Link", ComponentLink2URL=http://digikey.com/product-detail/en/panasonic-electronic-components/ERJ-3EKF21R5V/P21.5HCT-ND/198246, Composition="Thick Film", Features="Automotive AEC-Q200", Height - Seated (Max)="0.022\" (0.55mm)", LastUpdated="21-Jan-20 12:16:19 AM", Lifecycle Status=Active, Minimum Order=1, Number of Terminations=2, Package / Case="0603 (1608 Metric)", Packaging=TapeAndReel, Part Number=ERJ-3EKF21R5V, Part Status=Active, PartId=24202, Price=0.01, Resistance="21.5 Ohms", Series=ERJ, Size / Dimension="0.063\" L x 0.031\" W (1.60mm x 0.80mm)", Supplier 1=DigiKey
R14: library part RK73B3ATTE473J, "RES 47K OHM 5% 1W 2512", Device Package="2512 (6432 Metric)", Manufacturer="KOA Speer Electronics, Inc.", Operating Temperature="-55°C ~ 155°C", Power (Watts)=1W, Ratings=AEC-Q200, Supplier Device Package=2512, Supplier Part Number 1=2019-RK73B3ATTE473JCT-ND, Temperature Coefficient=±200ppm/°C, Tolerance=±5%, ComponentLink1Description=Datasheet, ComponentLink1URL=http://www.koaspeer.com/catimages/Products/RK73B/RK73B.pdf, ComponentLink2Description="DigiKey Link", ComponentLink2URL=http://digikey.com/product-detail/en/koa-speer-electronics-inc/RK73B3ATTE473J/2019-RK73B3ATTE473JCT-ND/10425370, Composition="Thick Film", Features="Automotive AEC-Q200, Moisture Resistant", Height - Seated (Max)="0.028\" (0.70mm)", LastUpdated="21-Jan-20 4:26:21 AM", Lifecycle Status=Active, Minimum Order=1, Number of Terminations=2, Package / Case="2512 (6432 Metric)", Packaging=TapeAndReel, Part Number=RK73B3ATTE473J, Part Status=Active, Price=0.04, Resistance="47 kOhms", Series=RK73B, Size / Dimension="0.248\" L x 0.122\" W (6.30mm x 3.10mm)", Supplier 1=DigiKey
R15: library part RT0603FRE071KL, "RES SMD 1K OHM 1% 1/10W 0603", Device Package="0603 (1608 Metric)", Manufacturer=Yageo, Operating Temperature="-55°C ~ 155°C", Power (Watts)="0.1W, 1/10W", Supplier Device Package=0603, Supplier Part Number 1=YAG2323CT-ND, Temperature Coefficient=±50ppm/°C, Tolerance=±1%, ComponentLink1Description=Datasheet, ComponentLink1URL=https://www.yageo.com/upload/media/product/productsearch/datasheet/rchip/PYu-RT_1-to-0.01_RoHS_L_11.pdf, ComponentLink2Description="DigiKey Link", ComponentLink2URL=http://digikey.com/product-detail/en/yageo/RT0603FRE071KL/YAG2323CT-ND/5252437, Composition="Thin Film", Height - Seated (Max)="0.022\" (0.55mm)", LastUpdated="21-Jan-20 12:24:38 AM", Lifecycle Status=Active, Minimum Order=1, Number of Terminations=2, Package / Case="0603 (1608 Metric)", Packaging=TapeAndReel, Part Number=RT0603FRE071KL, Part Status=Active, PartId=5672, Price=0.01, Resistance="1 kOhms", Series=RT, Size / Dimension="0.063\" L x 0.031\" W (1.60mm x 0.80mm)", Supplier 1=DigiKey
U1_1 U1_2 U1_3: "Half Bridge driver - N FET"
U2 U3 U4: library part DRV5011
U5_1 U5_2 U5_3: "Current sense amplifier"
U6: "PIC32MK Microcontroller IC 32-Bit 120MHz 1MB _1M x 8_ FLASH 64-TQFP _10x10_", Package="TQFP-64 Microchip", Digi-Key_Part_Number=PIC32MK1024MCF064-I/PT-ND, Digi-Key_Purchase_URL=https://www.digikey.kr/product-detail/en/microchip-technology/PIC32MK1024MCF064-I-PT/PIC32MK1024MCF064-I-PT-ND/7164902?utm_source=snapeda&utm_medium=aggregator&utm_campaign=symbol, MF=Microchip, MP=PIC32MK1024MCF064-I/PT, SnapEDA_Link=https://www.snapeda.com/parts/PIC32MK1024MCF064-I/PT/Microchip/view-part/876704/?ref=snap
U7: "11-V, 1-A H-bridge motor driver 8-WSON -40 to 85", Package="WSON-8 Texas Instruments", Availability=Good, DigiKey-Purchase-URL=https://snapeda.com/shop?store=DigiKey&id=617854, MF="Texas Instruments", Mouser-Purchase-URL=https://snapeda.com/shop?store=Mouser&id=617854, MP=DRV8837CDSGR, Price=None, SnapEDA_Link=https://www.snapeda.com/parts/DRV8837CDSGR/Texas%20Instruments/view-part/617854/?ref=snap, Texas_Instruments-Purchase-URL=https://snapeda.com/shop?store=Texas+Instruments&id=617854

## Free pads (board coordinates)
  round 0 hole 3.1 unplated: 1(-15,38) 1(-8,0) 1(0,-9.5) 1(0,9.5) 1(0,42) 1(8,0) 1(15,38) 1(37,37) 1(42,0)
  round 0 hole 8 unplated: 1(0,0)

## Via types
v1: diameter 0.7, hole 0.35, Top Layer to Bottom Layer, tented both sides, 83 vias
v2: diameter 0.7, hole 0.35, Top Layer to Bottom Layer, 4 vias

## Nets (pads, with @x,y where several pads share a name; then routed paths per layer and width w, separated by ;. In a path a pad name is that pad's centre, name@x,y a point inside that pad or via, vN(x,y) a via of type N, cw(c..) or ccw(c..) an arc to the next point about the centre after c; other vN are vias at no path point)
1V65: C19.2 IC2.5 R8.2 U5_1.1 U5_2.1 U5_3.1 | length 25.1
  Top Layer w0.254: IC2.5 11.85,16.65 12.15,16.35 R8.2 12.35,16.5 v1(13.5,16.5) ; C19.2 12.481,13.575 13.4,14.494 v1@13.4,16.3 ; U5_1.1 v1(16.9,16.6) ; U5_2.1 v1(20.8,16.6) ; v1(22.024,19.631) 22.11,19.545 22.855,19.545 24,18.4 24,17.4 23.498,16.898 23.398,16.898 23.35,16.85 U5_3.1
  Bottom Layer w0.254: v1(13.5,16.5) 13.55,16.55 16.85,16.55 v1(16.9,16.6) v1(20.8,16.6) 20.8,18.406 v1(22.024,19.631)
3V3: C3.1 C4.1 C5.1 C8.2 C9.2 C11_1.2 C11_2.2 C11_3.2 C15.2 C17.1 C20.1 C21.1 C22.1 C23.1 C24.1 C27.2 C29.2 IC1.4 IC2.1 L1.2 P4.2 R4.2 R5.1 R6.1 R10.1 R11.2 R15.2 R16.2 R17.2 U2.1 U3.1 U4.1 U5_1.3 U5_2.3 U5_3.3 U6.10 U6.19 U6.26 U6.34 U6.35 U6.38 U6.57 U7.8 | length 194.8
  Top Layer w0.254: U3.1@-14,-6.4 -13.849,-6.249 U3.1@-13.625,-6.249 ; U3.1@-13.821,-6.4 U3.1 -13.474,-6.249 U3.1@-13.625,-6.249 ; C4.1 U3.1@-13.625,-6.249 ; IC1.4 -8.361,18.87 -8.4,18.908 -8.4,19.975 C29.2 -8.202,20.423 -8.202,20.998 -7.9,21.3 -6.167,21.3 -6.1,21.233 ; C8.2 -7.125,15.75 C8.2@-6.8,15.425 ; P4.2 -4.62,31.67 -4.62,31.83 -4.59,31.83 -4.59,32.1 -2.39,34.3 2.55,34.3 ; v1@-3.825,20.075 v1(-3.7,20.2) ; R5.1 R4.2 R6.1 ; R10.1 -1.25,19.5 ; C23.1@-0.325,28.275 -0.25,28.35 U6.38 1.168,28.353 1.753,28.353 2.1,28.7 2.1,29.9 ; U6.35 2.05,29.85 2.1,29.9 ; U6.34 2.05,30.35 ; U2.1 1.27,14.43 2,13.7 2.975,13.7 C3.1 ; R16.2 2.55,34.3 ; 5.175,19 5.175,18.842 5.175,17.65 C15.2 C17.1 7.312,17.375 7.664,17.023 7.664,16.798 7.812,16.65 IC2.1 ; 5.594,18.867 5.619,18.842 ; U6.57 5.853,22.662 5.853,22.047 6.252,21.648 6.252,21.523 C24.1 ; 12.2,18.842 12.2,17.95 R17.2 ; U4.1 12.675,-8.92 14.805,-8.92 C5.1 ; C11_1.2 13.825,17.85 14.25,17.425 U5_1.3 ; C11_2.2 17.725,17.85 18.15,17.425 U5_2.3 ; U7.8 17.625,28.35 17.05,27.775 C27.2 16.95,27.775 16.623,27.448 15.698,27.448 R15.2 14.35,27.15 13.125,28.375 C21.1 11.55,28.375 11.025,27.85 U6.10 9.249,27.85 9.1,27.999 9.1,30.4 8.8,30.7 8.5,30.7 8.35,30.85 U6.19 8.35,33.075 C20.1 8.152,33.523 8.152,33.648 7.5,34.3 4.125,34.3 ; C11_3.2 21.625,17.85 22.05,17.425 U5_3.3 ; 2.05,30.35 2.1,30.3 2.1,29.9 ; 2.05,30.35 2.3,30.6 4.461,30.6 4.847,30.986 4.847,31.532 U6.26 4.85,32.346 4.448,32.748 4.448,32.877 C22.1 4.125,34.3 ; 2.55,34.3 4.125,34.3
  Top Layer w0.508: C8.2@-7.125,15.75 -7.075,15.8 -5.8,15.8 -4.746,16.854 -4.746,19.2 ; R5.1 R5.1@-3.7,21.55 ; C23.1 -0.35,28.275 -0.796,27.829 -0.988,27.829 -2.071,26.746 -2.071,26.221 -2.792,25.5 -3.865,25.5 -6.1,23.265 -6.1,21.233 L1.2 -4.746,19.2 ; C24.1 6.433,21.058 6.433,18.842 ; R11.2 13.825,21.225 13.825,19 17.725,19 ; C11_1.2 13.825,18.842 12.2,18.842 6.433,18.842 ; C11_2.2 17.725,19 ; C11_3.2 21.625,17.95 20.575,19 17.725,19 ; -4.746,19.2 -4.446,19.5 -1.25,19.5 4.517,19.5 5.175,18.842 5.619,18.842 6.433,18.842
  Bottom Layer w0.508: U3.1 -13.581,-6.4 -13.054,-5.873 -13.054,-5.829 -12.7,-5.475 -12.7,11.8 -9.2,15.3 -4.3,15.3 -2.3,13.3 0.865,13.3 1.162,13.598 1.162,14.892 U2.1 ; U2.1@1.27,14.893 1.53,14.633 2.567,14.633 12.4,4.8 12.4,-3.8 10.3,-5.9 10.3,-7.1 11.3,-8.1 U4.1@11.485,-8.1
  other v1: -3.7,19.3 -2.7,19.3 -2.7,20.2
BRAKE_SWITCH: R16.1 U6.31 | length 48.7
  Top Layer w0.254: -13.123,38 -13.023,37.9 v1(-8.3,37.9) ; v1(0,33.2) R16.1 1.53,32.92 1.53,32.549 1.774,32.305 2.103,32.305 2.347,32.06 2.347,31.538 U6.31
  Top Layer w1: -13,38 ccw(c-15,38) -13,38
  Bottom Layer w0.254: -13.123,38 -13.023,37.9 -13,37.9 -4.7,37.9 v1(0,33.2)
  Bottom Layer w1: -13,38 ccw(c-15,38) -13,38
Bridge_Out1: P1.1 R7_1.2 U5_1.4 | length 20
  Top Layer w0.254: U5_1.4 14.275,14.375 14.275,12.125 v1(14.3,12.1)
  Top Layer w0.712: P1.1 16.4,-3.078 16.656,-3.334 16.656,-4.406 16.75,-4.5 R7_1.2
  Bottom Layer w0.254: v1(14.3,12.1) 14.3,4.961 15.231,4.03 15.231,-1.831 P1.1
Bridge_Out2: P2.1 R7_2.2 U5_2.4 | length 20.5
  Top Layer w0.254: U5_2.4 18.15,11.75 v1(19,10.9)
  Top Layer w0.712: P2.1 21.855,-3.055 21.855,-3.197 21.86,-3.202 21.86,-4.406 21.954,-4.5 R7_2.2
  Bottom Layer w0.254: v1(19,10.9) 19,-0.2 P2.1
Bridge_Out3: P3.1 R7_3.2 U5_3.4 | length 21.4
  Top Layer w0.254: v1(21.8,12.2) 21.8,12.321 22.05,12.571 U5_3.4
  Top Layer w0.712: P3.1 27.255,-3.055 27.255,-3.197 27.26,-3.202 27.26,-4.406 27.354,-4.5 R7_3.2
  Bottom Layer w0.254: v1(21.8,12.2) 21.8,7.341 27.2,1.941 P3.1
Bridge_Vout_1: C2_1.1 Q1_1.1 Q1_1.2 Q1_1.3 Q2_1.5 Q2_1.6 Q2_1.7 Q2_1.8 R7_1.1 U1_1.4 U5_1.5 | length 35.4
  Top Layer w0.254: U5_1.5 14.869,14.369 14.869,12.769 15.3,12.338 v1(15.3,12.1) ; C2_1.1 v1(16.3,2.2) 17.1,1.4 18.2,1.4 19,2.2 19,4.812 18.504,5.308 17.825,5.308 17.613,5.52 17.613,6.052 U1_1.4 ; Q1_1.2 18.175,-3.37 18.131,-3.414 18.131,-4.081 18.55,-4.5 R7_1.1@19.1,-4.5 ; Q2_1.7 19.175,-5.8 19.175,-4.919 19.56,-4.919 19.979,-4.5 v1(20.1,-4.5)
  Bottom Layer w0.254: v1(15.3,12.1) 15.3,4.5 16.3,3.5 16.3,-0.7 v1(20.1,-4.5)
Bridge_Vout_2: C2_2.1 Q1_2.1 Q1_2.2 Q1_2.3 Q2_2.5 Q2_2.6 Q2_2.7 Q2_2.8 R7_2.1 U1_2.4 U5_2.5 | length 36.1
  Top Layer w0.254: U5_2.5 18.8,13.1 v1(19.7,12.2) ; C2_2.1 v1(23.8,2.2) 24.6,1.4 25.7,1.4 26.5,2.2 26.5,4.812 26.004,5.308 25.325,5.308 25.113,5.52 25.113,6.052 U1_2.4 ; Q2_2.7 23.584,-5.8 23.575,-5.791 23.575,-4.725 R7_2.1 ; Q1_2.2 23.575,-3.37 23.525,-3.42 23.525,-4.225 R7_2.1 ; v1(25.336,-4.302) 23.998,-4.302 R7_2.1
  Bottom Layer w0.254: v1(19.7,12.2) 19.731,12.169 19.731,6.269 v1(23.8,2.2) 23.8,-2.766 v1(25.336,-4.302)
Bridge_Vout_3: C2_3.1 Q1_3.1 Q1_3.2 Q1_3.3 Q2_3.5 Q2_3.6 Q2_3.7 Q2_3.8 R7_3.1 U1_3.4 U5_3.5 | length 36.4
  Top Layer w0.254: U5_3.5 22.7,12.521 22.9,12.321 v1(22.9,12.2) ; Q1_3.2 28.975,-3.37 28.925,-3.42 28.925,-4.225 R7_3.1 v1(30.3,-4.5) ; C2_3.1 v1(31.3,2.2) 32.1,1.4 33.2,1.4 34,2.2 34,4.812 33.504,5.308 32.825,5.308 32.613,5.52 32.613,6.052 U1_3.4
  Bottom Layer w0.254: v1(22.9,12.2) 22.9,8.3 25.9,5.3 28.2,5.3 v1(31.3,2.2) 30.3,1.2 v1(30.3,-4.5)
GND: C1_1.1 C1_2.1 C1_3.1 C3.2 C4.2 C5.2 C6.1 C7.2 C8.1 C9.1 C10.1 C11_1.1 C11_2.1 C11_3.1 C12.1 C13.1 C14.2 C15.1 C16.2 C17.2 C18.1 C19.1 C20.2 C21.2 C22.2 C23.2 C24.2 C25.2 C26.2 C27.1 C28.2 D2.2 IC1.6 IC1.8 IC1.9 IC2.2 J1.1 J1.3 J1.5 J2.1 J2.3 J2.5 J3.2 J3.4 J3.6 J4.2 J4.4 J4.6 P4.3 P5.1 Q2_1.1 Q2_1.2 Q2_1.3 Q2_2.1 Q2_2.2 Q2_2.3 Q2_3.1 Q2_3.2 Q2_3.3 R1_1.2 R1_2.2 R1_3.2 R9.1 U1_1.9 U1_1.11 U1_2.9 U1_2.11 U1_3.9 U1_3.11 U2.2 U3.2 U4.2 U5_1.2 U5_2.2 U5_3.2 U6.9 U6.20 U6.25 U6.41 U6.56 U6.65 U7.4 U7.9 UART.1 | length 380.9
  Top Layer w0.254: J1.1 -17.05,-8.8 ; -15.85,14.55 -15.85,14.6 -8.2,14.6 ; C6.1 -13.075,17.125 C7.2 ; U3.2 -13.186,-7.5 -14.486,-8.8 -17.05,-8.8 ; C7.2@-11.394,17.031 C7.2 ; IC1.6 -9.284,18.37 -9.111,18.197 IC1.9 -9.111,17.4 ; IC1.8@-10.038,17.393 IC1.8 ; -8.6,16.7 -9.111,17.211 -9.111,17.4 ; C8.1 -8.2,15.525 -8.2,14.6 ; J3.2 -17.05,-12.63 -17.05,-8.8 ; C9.1 -3.1,14.6 ; C23.2 -0.225,26.85 U6.41 U6.65@4.416,26.85 ; D2.2 3.15,17.35 2.7,16.9 ; v2(3.3,24.7) 3.3,24.8 U6.65@5.35,26.85 ; v2(3.3,27.3) U6.65@3.966,27.3 ; v2(3.3,29.5) 3.3,27.966 U6.65@3.966,27.3 ; C24.2 5.35,21.325 U6.56 U6.65@5.35,26.85 ; v2(6.5,29.5) 6.3,29.5 5.6,28.8 U6.65@5.6,27.957 ; U6.20 7.85,32.346 7.448,32.748 7.448,32.877 C20.2 C22.2 5.35,33.075 U6.25 U6.65@5.35,27.857 ; IC2.2 7.156,15.7 7.154,15.702 6.823,15.702 C17.2 C15.1 4.85,16.025 4.725,15.9 4.725,15.075 ; C19.1 11.475,12.1 9.5,12.1 8.985,12.615 8.985,12.802 R9.1 6.7,13.1 4.725,15.075 ; C21.2 11.55,27.025 11.225,27.35 U6.9 U6.65@5.85,27.35 ; U4.2 13.19,-7.7 16.175,-7.7 ; C1_1.1 15.023,7.198 16.037,7.198 16.473,7.634 16.473,7.873 U1_1.11@16.6,8 ; 15.097,36.123 15,36.026 v1(15,33.9) 16.849,32.051 17.349,32.051 19.112,30.288 19.112,29.388 U7.9 19.4,29.45 19.793,29.843 20.378,29.843 U7.4 ; C11_1.1 14.9,17.625 U5_1.2 14.948,16.552 14.948,16.052 15.5,15.5 17.3,15.5 ; C27.1 17.275,26.7 19.025,26.7 19.217,26.892 C28.2 ; U1_1.11@17.25,7.35 17.181,7.419 U1_1.11 U1_1.11@16.6,8 ; C11_2.1 18.8,17.625 U5_2.2 18.8,15.5 ; 19.217,22 19.225,22.008 ; 21.293,22 21.293,19.328 21.722,18.9 22.038,18.9 22.402,18.535 22.402,18.523 22.975,17.95 C11_3.1 22.7,17.625 U5_3.2@22.7,16.7 ; C1_2.1 22.523,7.198 23.537,7.198 23.973,7.634 23.973,7.873 U1_2.11@24.1,8 ; U5_3.2 22.652,16.552 22.652,15.98 22.503,15.831 19.797,15.831 19.466,15.5 18.8,15.5 ; U1_2.9 U1_2.11@24.1,8 ; U1_2.11@24.681,7.419 U1_2.11 U1_2.11@24.1,8 ; J4.6 J4.6@27.16,-12.79 ; C1_3.1 30.023,7.198 31.037,7.198 31.473,7.634 31.473,7.873 U1_3.11@31.6,8 ; U1_3.9 U1_3.11@31.6,8 ; U1_3.11@32.2,7.4 U1_3.11 U1_3.11@31.6,8 ; C7.2 -11.055,17.37 IC1.8 ; IC1.8 -9.142,17.37 -9.111,17.4 ; -8.2,14.6 -3.1,14.6 ; -3.1,14.6 -1.8,13.3 -0.549,13.3 -0.086,13.763 -0.086,14.914 U2.2 0.151,15.151 0.151,16.451 0.6,16.9 2.7,16.9 ; 2.7,16.9 2.7,15.375 C3.2 4.725,15.075 ; U6.65@3.966,27.3 5.303,27.838 U6.65@5.35,27.857 ; U6.65@3.966,27.3 U6.65@4.166,27.1 ; U6.65@3.966,27.3 3.469,27.1 U6.65@4.166,27.1 ; U6.65@4.166,27.1 U6.65 ; U6.65@4.166,27.1 U6.65@4.416,26.85 ; U6.65@4.416,26.85 U6.65@5.35,26.85 ; U6.65@5.35,26.85 U6.65 ; U6.65@5.35,27.857 U6.65@5.6,27.957 ; U6.65@5.35,27.857 5.35,27.6 U6.65@5.6,27.35 ; U6.65 U6.65@5.725,27.225 ; U6.65@5.6,27.35 U6.65@5.725,27.225 ; U6.65@5.6,27.35 U6.65@5.6,27.957 ; U6.65@5.6,27.957 7.034,28.534 U6.65@5.85,27.35 ; U6.65@5.725,27.225 U6.65@5.85,27.35 ; U1_1.11@16.6,8 U1_1.9 16.6,9.7 16.2,10.1 16.2,12.6 17.3,13.7 17.3,15.5 ; 17.3,15.5 18.8,15.5 ; C18.1@37.45,-1 37.45,-0.75 37.973,-0.227 37.973,-0.477 C18.1@37.45,-1
  Top Layer w0.508: -17.079,19.4 -16.979,19.3 ; J2.5 J2.3 -11.6,25 UART.1
  Top Layer w0.712: C6.1@-13.075,17.125 C6.1@-13.069,17.131 ; C21.2 11.631,26.994 12.606,26.994 14.781,24.819 14.781,24.194 C25.2 ; C13.1 14,-4.2 16.175,-6.375 16.175,-7.7 C5.2 16.081,-8.994 16.081,-12.63 J4.2 ; C25.2@14.969,23.956 16.925,22 19.217,22 ; U1_1.11@16.85,7.75 U1_1.11 ; U1_1.11@17.181,7.419 R1_1.2@19.569,7.419 ; C28.2@19.217,26.892 19.217,22 ; C28.2 19.319,26.994 19.319,27.321 19.4,27.402 U7.9 ; R1_1.2 R1_1.2@19.569,7.419 ; U1_2.11@24.681,7.419 R1_2.2@27.069,7.419 ; R1_2.2 R1_2.2@27.069,7.419 ; J4.6@27.16,-12.79 J4.6@27.16,-12.47 ; U1_3.11@32.2,7.4 34.55,7.4 R1_3.2 ; R1_3.2 37.4,7.35 ; C26.2 36.569,-3.606 36.569,-2.531 37.4,-1.7 C18.1 ; C26.2@36.569,-3.844 36.8,-4.075 P5.1 ; C18.1@37.45,-0.75 37.4,-0.7 37.4,7.35 ; 19.217,22 21.293,22 23,22 28.2,16.8 28.2,12.4 ; R1_1.2@19.569,7.419 20.183,7.419 20.6,7.836 20.6,9.836 21.495,10.731 23.131,10.731 24.8,12.4 28.2,12.4 ; R1_2.2@27.069,7.419 27.783,7.419 28.2,7.836 28.2,12.4 ; 28.2,12.4 33.2,12.4 37.4,8.2 37.4,7.35
  Top Layer w1: J2.1 -17.079,22.971 -17.079,19.4 -17.079,15.779 -15.85,14.55 ; 17,38 ccw(c15,38) 17,38
  Bottom Layer w0.254: v1(15,33.9) 15,36 15,36.021 15.102,36.123